# Altium PCB MB_v1.PcbDoc (part 4 of 10)
Units mm, origin at the board's own origin, x right, y up, seen from the top; angles counter-clockwise.
Board outline 203 x 72 mm, 6 copper layers (Top Layer, Layer 3, Layer 1, Layer 2, Layer 4, Bottom Layer), stack 1.52 mm thick; 655 components, 569 nets, 2943 pads, 1834 vias.
Unrouted connection lines stored in the file: 31.
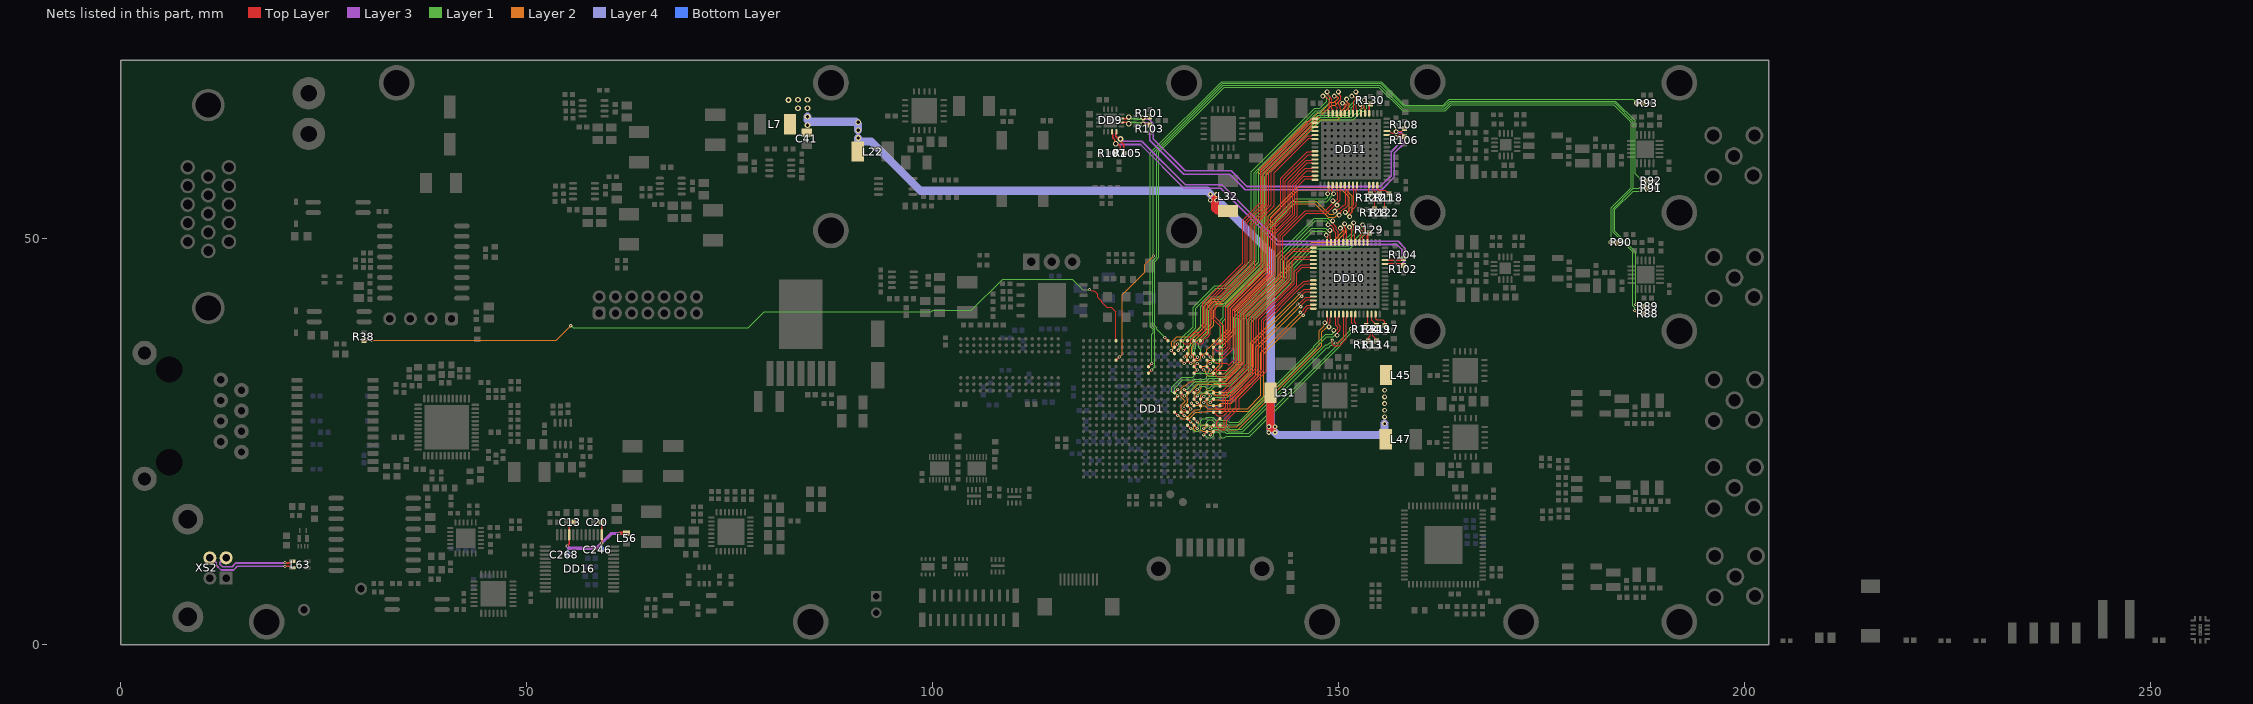
[diagram p7: the nets of this part, all layers, seen from the top]

## Part data (continued)
R80: library part "Чип резистор 0402 12.4 кОм, 1%", "ЧИП-резистор", Tolerance=±1%, PackageReference=0402, TKE="100 ppm/°С"
R82 R84 R85 R86: library part "Чип резистор 0402 75 Ом, 5%", "ЧИП-резистор", Tolerance=±5%, PackageReference=0402, TKE="100 ppm/°С"
R87 R178: library part "Чип резистор 0402 330 Ом, 5%", "ЧИП-резистор", Tolerance=±5%, PackageReference=0402, TKE="100 ppm/°С"
R89 R90 R92 R93 R99 R113 R115 R116 R117 R118 R128 R129 R130 R135 R136 R140 R141 R142 R143 R184 R185 R186 R187 R188: library part "Чип резистор 0402 100 Ом, 5%", "ЧИП-резистор", Tolerance=±5%, PackageReference=0402, TKE="100 ppm/°С"
R101 R103 R105 R107: library part "Чип резистор 0402 130 Ом, 5%", "ЧИП-резистор", Tolerance=±5%, PackageReference=0402, TKE="100 ppm/°С"
R102 R104 R106 R108: library part "Чип резистор 0402 82 Ом, 5%", "ЧИП-резистор", Tolerance=±5%, PackageReference=0402, TKE="100 ppm/°С"
R120 R126 R169: library part "Чип резистор 0402 200 Ом, 5%", "ЧИП-резистор", Tolerance=±5%, PackageReference=0402, TKE="100 ppm/°С"
R131 R132 R133 R134: library part "Чип резистор 0402 10 Ом, 5%", "ЧИП-резистор", Tolerance=±5%, PackageReference=0402, TKE="100 ppm/°С"
R137 R138: library part "Чип резистор 0402 47 Ом, 5%", "ЧИП-резистор", Tolerance=±5%, PackageReference=0402, TKE="100 ppm/°С"
R145: library part "Чип резистор 0402 2.7 кОм, 5%", "ЧИП-резистор", Tolerance=±5%, LatestRevisionDate=17-Jul-2002, LatestRevisionNote="Re-released for DXP Platform.", PackageReference=0402, Published=8-Jun-2000, Publisher="Altium Limited", TKE="100 ppm/°С"
R147 R148 R149 R150: library part "Чип резистор 0402 49,9 Ом, 1%", "ЧИП-резистор", Tolerance=±1%, PackageReference=0402, TKE="100 ppm/°С"
R152 R153 R154 R155 R157 R172 R173 R174: library part "Чип резистор 0402 0 Ом", "ЧИП-резистор", Tolerance=±5%, PackageReference=0402, TKE="100 ppm/°С"
R164: library part "Чип резистор 0402 12 кОм, 5%", "ЧИП-резистор", Tolerance=±5%, PackageReference=0402, TKE="100 ppm/°С"
R165 R166 R167 R168: library part "Чип резистор 0402 51 кОм, 5%", "ЧИП-резистор", Tolerance=±5%, PackageReference=0402, TKE="100 ppm/°С"
R171: library part "Чип резистор 0402 2,2 кОм, 5%", "ЧИП-резистор", Tolerance=±5%, PackageReference=0402, TKE="100 ppm/°С"
R175 R176 R177: library part "Чип резистор 0402 470 кОм, 5%", "ЧИП-резистор", Tolerance=±5%, PackageReference=0402, TKE="100 ppm/°С"
R? R?: library part "Чип резистор 0402 100 кОм, 5%", "ЧИП-резистор", Tolerance=±5%, PackageReference=0402, TKE="100 ppm/°С"
R?: library part "Чип резистор 0402 9,1 кОм, 5%", "ЧИП-резистор", Tolerance=±5%, PackageReference=0402, TKE="100 ppm/°С"
T1 T2 T3: library part "ЧИП трансформатор TC4-1T+", "RF Transformer 50Ω 0.5 to 300 MHz 1:4", Manufacturer=minicircuits, ManufacturerPartNumber=ADT2-1T+, ComponentLink1Description=datasheet, ComponentLink1URL=https://ww2.minicircuits.com/pdfs/ADT2-1T+.pdf
T4 T5: library part "ЧИП трансформатор MABA-011062", "1:2 Step up Flux Coupled Balun Transformer 1 – 300 MHz", Manufacturer=MACOM, ComponentLink1Description=datasheet, ComponentLink1URL=https://cdn.macom.com/datasheets/MABA-011062.pdf, ManufacturerPartNumber=MABA-011062
VD1 VD2: library part "ЧИП диод BAS16", "High-speed switching diodes", Manufacturer=Nexperia, Power/Voltage=100В, ComponentLink1Description=datasheet, ComponentLink1URL=https://assets.nexperia.com/documents/data-sheet/BAS16_SER.pdf, ManufacturerPartNumber=BAS16
VD3: library part "Диодная сборка RClamp1255P", "Low Capacitance RClamp Surge Protection for uUSB Interfaces", Manufacturer=SEMTECH, PackageReference=SLP1510N6
VU1 VU2 VU3: library part "Оптопара транзисторная PC3H7J00000F", "Mini-falt Package, General Purpose Half Pitch Photocouper", ComponentLink1Description="Manufacturer Link", ComponentLink1URL=http://www.vishay.com/optocouplers/list/product-83640/, ComponentLink2Description=Datasheet, ComponentLink2URL=http://www.vishay.com/docs/83640/83640.pdf, PackageReference=SOP-4
X1 X2 X3 X4: library part "Соединение под пайку", "Соединитель"
XP1: library part "Соединитель XT30UPB-M", "AMASS XT30UPB-M  5 mm"
XP2: library part "Соединитель IDC2-14MS", "JTAG Xilinx IDC2-14MS", Manufacturer=Molex
XP3: library part "Соединитель FH12-20S-0.5SVA", "FPC Connectors, Flex-to-Board, 20 Position, .5mm [.02in]"
XP4: library part "Соединитель FH12-10S-0.5SVA", "0.5mm  Pitch FPC/FFC Connector FH12 Series", Manufacturer=Hirose
XP6: library part "Соединитель WB-02 (MW-2M)", "Соединитель"
XP7: library part "Соединитель PLS-3 (DS1021-1x3)", "Вилка штыревая 2.54мм 1x3 прямая тип1"
XS1: library part "Соединитель KLS12-107L-2-8P8C-0", "Modular Jack RJ45", Manufacturer=KLS
XS2: library part "Соединитель USBB-1J", "Universal Serial Bus (USB) Shielded I/O Receptacle, Right Angle, Type B", Manufacturer=Connfly
XS3: library part "Соединитель DHR-15FB (DS1038-15F)", "Гнездо 15 pin высокой плотности на плату", Manufacturer=Connfly
XS4: library part "Соединитель KLS1-SATA001", "SATA Type A 7P Male Connector,SMD", Manufacturer=KLS
XW1 XW2 XW3 XW4 XW5: library part "Соединитель коаксиальный SMA-JR", "SMA-JR Разъем SMA гнездо на плату, прямой угол", ComponentLink1Description=datasheet, ComponentLink1URL=http://www.brownbear.ru/goods/2243.html
Z1 Z2 Z3: library part "Фильтр EMI EClamp2394P", "ESD/EMI Protection  for Color LCD Interfaces", Manufacturer=SEMTECH, PackageReference=SLP2116P8
Z4 Z5: library part "Фильтр EMI NUF4220MN", "ESD/EMI Protection  for Audio Interfaces", Manufacturer=onsemi, PackageReference=DFN8

## Free pads (board coordinates)
  round 4.4 hole 3.2: 1(18,2.8) 1(34,69.2) 1(85,2.8) 1(87.5,51) 1(87.5,69.2) 1(131,51) 1(131,69.2) 1(148,2.8) 1(161,38.6) 1(161,53.2) 1(161,69.3) 1(172.5,2.8) 1(192,2.8) 1(192,38.6) 1(192,53.2) 1(192,69.2)

## Via types
v1: diameter 0.4, hole 0.2, Top Layer to Bottom Layer, tented both sides, 654 vias
v2: diameter 0.8, hole 0.4, Top Layer to Bottom Layer, tented both sides, 489 vias
v3: diameter 0.6, hole 0.3, Top Layer to Bottom Layer, tented both sides, 354 vias
v4: diameter 0.7, hole 0.4, Top Layer to Bottom Layer, tented both sides, 144 vias
v5: diameter 0.8, hole 0.4, Top Layer to Bottom Layer, 87 vias
v6: diameter 0.9, hole 0.5, Top Layer to Bottom Layer, 45 vias
v7: diameter 0.66, hole 0.4, Top Layer to Bottom Layer, 25 vias
v8: diameter 0.7, hole 0.3, Top Layer to Bottom Layer, 13 vias
v9: diameter 0.5, hole 0.2, Top Layer to Bottom Layer, 12 vias
v10: diameter 0.5, hole 0.3, Top Layer to Bottom Layer, 5 vias
v11: diameter 1, hole 0.5, Top Layer to Bottom Layer, 2 vias
v12: diameter 0.4, hole 0.2, Top Layer to Bottom Layer, 2 vias
v13: diameter 0.9, hole 0.4, Top Layer to Bottom Layer, tented both sides, 2 vias

## Nets (pads, with @x,y where several pads share a name; then routed paths per layer and width w, separated by ;. In a path a pad name is that pad's centre, name@x,y a point inside that pad or via, vN(x,y) a via of type N, cw(c..) or ccw(c..) an arc to the next point about the centre after c; other vN are vias at no path point)
_USBD_N: L63.1 XS2.2 | length 10.6
  Top Layer w0.2: v1(20.25,10.1) 20.288,10.062 20.43,10.062 20.441,10.05 20.8,10.05 21,10.25 L63.1@21.175,10.25
  Layer 3 w0.2: XS2.2@12.997,10.683 12.787,10.683 12.197,10.093 12.197,9.927 12.541,9.583 13.735,9.583 14.202,10.05 20.059,10.05 20.07,10.062 20.212,10.062 v1(20.25,10.1)
_USBD_P: L63.4 XS2.3 | length 11.3
  Top Layer w0.2: v1(20.25,9.6) 20.288,9.638 20.43,9.638 20.441,9.65 20.8,9.65 21,9.45 L63.4@21.175,9.45
  Layer 3 w0.2: XS2.3@10.997,10.683 11.207,10.683 11.797,10.093 11.797,9.762 12.376,9.183 13.901,9.183 14.368,9.65 20.059,9.65 20.07,9.638 20.212,9.638 v1(20.25,9.6)
ADC0_D0_N: DD1.K20 DD10.21 | length 37.2
  Top Layer w0.125: v3(152.988,51.688) 153.066,51.609 153.066,51.327 153.286,51.106 153.286,50.491 153.004,50.209 153.004,49.963 153.092,49.875 DD10.21@153.092,49.548
  Top Layer w0.2: v1(133.411,29.824) DD1.K20@133.812,30.225
  Layer 1 w0.125: v1(133.411,29.824) 133.773,30.186 134.314,30.186 134.576,30.448 136.373,30.448 139.3,33.375 139.3,39.703 144.55,44.953 144.55,46.425 146.905,48.78 151.43,48.78 153.286,50.636 153.286,51.106 153.066,51.327 153.066,51.609 v3(152.988,51.688)
ADC0_D0_P: DD1.K19 DD10.22 | length 36.1
  Top Layer w0.125: v3(152.475,51.175) 152.553,51.097 152.836,51.097 152.961,50.972 152.961,50.625 152.679,50.343 152.679,49.963 152.592,49.875 DD10.22@152.592,49.548
  Top Layer w0.2: DD1.K19@133.012,30.225 133.051,30.225 133.375,30.549 v1(133.413,30.549)
  Layer 1 w0.125: v1(133.413,30.549) 133.851,30.986 134.364,30.986 134.576,30.773 136.239,30.773 138.975,33.51 138.975,39.837 144.225,45.087 144.225,46.56 146.77,49.105 151.295,49.105 152.961,50.771 152.961,50.972 152.836,51.097 152.553,51.097 v3(152.475,51.175)
ADC0_D1_N: DD1.K18 DD10.23 | length 36.6
  Top Layer w0.125: v3(151.888,51.938) 151.888,51.361 151.987,51.261 151.987,50.973 152.004,50.956 152.004,49.963 152.092,49.875 DD10.23@152.092,49.548
  Top Layer w0.2: DD1.K18@132.212,30.225 v1(132.613,30.626)
  Layer 1 w0.125: v1(132.613,30.626) 132.976,30.989 133.489,30.989 133.755,31.255 134.237,31.255 134.857,31.875 136.7,31.875 138.75,33.925 138.75,39.931 143.975,45.156 143.975,46.87 146.435,49.33 150.726,49.33 152.013,50.616 152.013,51.286 151.888,51.411 v3(151.888,51.938)
ADC0_D1_P: DD1.J18 DD10.24 | length 35.2
  Top Layer w0.125: v3(151.375,51.425) 151.375,51.414 151.662,51.126 151.662,50.838 151.679,50.822 151.679,49.963 151.592,49.875 DD10.24@151.592,49.548
  Top Layer w0.2: DD1.J18@132.212,31.025 132.219,31.025 132.606,31.412 v1(132.613,31.412)
  Layer 1 w0.125: v1(132.613,31.412) 132.99,31.789 133.564,31.789 133.773,31.58 134.102,31.58 134.722,32.2 136.565,32.2 138.425,34.06 138.425,40.065 143.65,45.29 143.65,47.005 146.3,49.655 150.592,49.655 151.687,50.751 151.687,51.151 151.414,51.425 v3(151.375,51.425)
ADC0_D2_N: DD1.M17 DD10.25 | length 37.5
  Top Layer w0.125: v3(150.763,51.813) 150.785,51.79 150.785,51.325 151.061,51.049 151.061,50.379 151.004,50.322 151.004,49.963 151.092,49.875 DD10.25@151.092,49.548
  Top Layer w0.2: v1(130.989,29.07) 130.989,29.059 131.412,28.636 DD1.M17@131.412,28.625
  Layer 2 w0.125: v1(130.989,29.07) 131.042,29.123 131.042,29.43 131.44,29.828 131.44,30.2 131.323,30.317 131.323,30.421 131.376,30.473 131.376,30.702 132.749,32.075 135.61,32.075 138.375,34.84 138.375,40.71 146.888,49.223 149.62,49.223 149.917,49.52 149.917,49.818 150.913,50.814 150.913,51.186 150.774,51.325 150.774,51.801 v3(150.763,51.813)
ADC0_D2_P: DD1.L17 DD10.26 | length 39.3
  Top Layer w0.125: v3(150.25,51.3) 150.351,51.3 150.736,50.915 150.736,50.513 150.679,50.456 150.679,49.963 150.592,49.875 DD10.26@150.592,49.548
  Top Layer w0.2: DD1.L17@131.412,29.425 v1(131.813,29.024)
  Layer 2 w0.125: v1(131.813,29.024) 131.498,28.708 130.839,28.708 130.627,28.92 130.627,29.474 131.115,29.962 131.115,30.066 131.042,30.139 130.985,30.139 130.648,30.476 130.648,31.577 130.935,31.864 131.164,31.864 131.7,32.4 135.475,32.4 138.05,34.975 138.05,40.844 146.754,49.548 149.485,49.548 149.592,49.655 149.592,49.952 150.588,50.948 150.588,51.052 150.339,51.3 v3(150.25,51.3)
ADC0_D3_N: DD1.K15 DD10.27 | length 38.5
  Top Layer w0.125: v3(149.288,52.188) 149.366,52.109 149.366,51.827 149.762,51.431 149.762,51.098 150.004,50.856 150.004,49.963 150.092,49.875 DD10.27@150.092,49.548
  Top Layer w0.2: DD1.K15@129.812,30.225 v1(130.213,30.626)
  Layer 1 w0.125: v1(130.213,30.626) 130.213,30.657 130.007,30.864 129.768,30.864 129.501,31.131 129.501,31.722 130.693,32.914 132.065,32.914 132.251,33.1 132.251,33.213 132.463,33.425 133.044,33.425 133.057,33.413 133.637,33.413 133.665,33.44 134.084,33.44 134.174,33.35 135.915,33.35 137.1,34.535 137.1,40.328 142.25,45.478 142.25,47.735 147.034,52.518 148.675,52.518 148.927,52.266 149.209,52.266 v3(149.288,52.188)
ADC0_D3_P: DD1.J15 DD10.28 | length 36.9
  Top Layer w0.125: v3(148.744,51.708) 148.823,51.629 149.105,51.629 149.437,51.296 149.437,50.963 149.679,50.722 149.679,49.963 149.592,49.875 DD10.28@149.592,49.548
  Top Layer w0.2: DD1.J15@129.812,31.025 v1(130.213,31.426)
  Layer 1 w0.125: v1(130.213,31.426) 130.213,31.396 130.007,31.189 129.903,31.189 129.826,31.266 129.826,31.587 130.828,32.589 132.261,32.589 132.333,32.661 133.561,32.661 133.773,32.873 133.773,33.042 133.846,33.115 133.95,33.115 134.04,33.025 136.05,33.025 137.425,34.4 137.425,40.193 142.575,45.343 142.575,47.6 147.168,52.193 148.54,52.193 148.665,52.068 148.665,51.787 v3(148.744,51.708)
ADC0_D4_N: DD1.J17 DD10.29 | length 32.9
  Top Layer w0.125: v3(148.95,51.013) 149.004,50.959 149.004,49.963 149.092,49.875 DD10.29@149.092,49.548
  Top Layer w0.2: v1(131.011,31.426) DD1.J17@131.412,31.025
  Layer 1 w0.125: v1(131.011,31.426) 131.417,31.426 132.09,32.1 132.426,32.436 133.752,32.436 134.116,32.8 136.143,32.8 137.725,34.382 137.725,40.175 142.92,45.37 142.92,47.43 146.741,51.25 148.433,51.25 148.591,51.093 148.87,51.093 v3(148.95,51.013)
ADC0_D4_P: DD1.J16 DD10.30 | length 32.4
  Top Layer w0.125: v3(148.504,50.441) 148.504,50.336 148.679,50.161 148.679,49.963 148.592,49.875 DD10.30@148.592,49.548
  Top Layer w0.2: DD1.J16@130.612,31.025 v1(131.013,30.624)
  Layer 1 w0.125: v1(131.013,30.624) 131.013,30.625 131.49,31.101 131.551,31.101 132.225,31.775 132.561,32.111 133.887,32.111 134.251,32.475 136.278,32.475 138.05,34.247 138.05,40.04 143.245,45.236 143.245,47.295 146.875,50.925 148.299,50.925 148.424,50.8 148.424,50.521 v3(148.504,50.441)
ADC0_D5_N: DD1.J22 DD10.33 | length 24.1
  Top Layer w0.125: DD1.J22@135.412,31.025 135.486,31.025 135.716,31.254 135.79,31.254 137.527,32.992 139,34.465 139,40.498 143.4,44.898 143.4,46.422 143.4,47.825 144.361,48.786 146.502,48.786 146.59,48.873 DD10.33@146.917,48.873
ADC0_D5_P: DD1.J21 DD10.34 | length 25.1
  Top Layer w0.125: DD1.J21@134.612,31.025 135,30.637 135.633,30.637 136.15,31.155 137.662,32.667 139.325,34.33 139.325,40.363 143.725,44.763 143.725,46.287 143.725,47.69 144.495,48.461 146.502,48.461 146.59,48.373 DD10.34@146.917,48.373
ADC0_D6_N: DD1.L22 DD10.35 | length 24.9
  Top Layer w0.125: DD1.L22@135.412,29.425 135.486,29.425 135.574,29.338 135.726,29.338 135.8,29.411 135.8,30.447 136.305,30.953 136.305,30.956 136.4,31.051 137.766,32.417 139.575,34.226 139.575,40.26 143.975,44.66 143.975,46.183 143.975,47.33 144.431,47.786 146.502,47.786 146.59,47.873 DD10.35@146.917,47.873
ADC0_D6_P: DD1.L21 DD10.36 | length 25.9
  Top Layer w0.125: DD1.L21@134.612,29.425 134.686,29.425 135.098,29.013 135.861,29.013 136.125,29.276 136.125,30.313 136.63,30.818 136.63,30.822 136.725,30.917 137.9,32.092 139.9,34.092 139.9,40.125 144.3,44.525 144.3,46.049 144.3,47.195 144.565,47.461 146.502,47.461 146.59,47.373 DD10.36@146.917,47.373
ADC0_D7_N: DD1.M22 DD10.37 | length 24.2
  Top Layer w0.125: DD1.M22@135.412,28.625 135.486,28.625 135.574,28.538 135.739,28.538 136.375,29.173 136.375,29.886 136.75,30.262 136.75,30.585 136.88,30.714 136.88,30.718 136.975,30.813 138.004,31.842 140.221,34.059 140.221,40.093 144.55,44.422 144.55,45.945 145.403,46.798 146.137,46.798 146.149,46.786 146.502,46.786 146.59,46.873 DD10.37@146.917,46.873
ADC0_D7_P: DD1.M21 DD10.38 | length 25.1
  Top Layer w0.125: DD1.M21@134.612,28.625 134.686,28.625 135.098,28.213 135.874,28.213 136.7,29.038 136.7,29.752 137.075,30.127 137.075,30.45 137.205,30.58 137.205,30.583 137.3,30.679 137.909,31.287 140.546,33.925 140.546,39.958 144.875,44.287 144.875,45.811 145.538,46.473 146.002,46.473 146.014,46.461 146.502,46.461 146.59,46.373 DD10.38@146.917,46.373
ADC0_D8_N: DD1.P22 DD10.41 | length 23.6
  Top Layer w0.125: DD1.P22@135.412,27.025 135.486,27.025 135.574,26.938 135.726,26.938 135.925,27.136 135.925,27.775 137.455,29.305 137.455,30.439 140.796,33.781 140.796,39.855 144.459,43.517 144.459,43.538 144.862,43.941 144.883,43.941 145.715,44.773 146.157,44.773 146.169,44.786 146.502,44.786 146.59,44.873 DD10.41@146.917,44.873
ADC0_D8_P: DD1.N22 DD10.42 | length 25.2
  Top Layer w0.125: DD1.N22@135.412,27.825 135.024,27.437 135.024,26.864 135.276,26.613 135.861,26.613 136.25,27.001 136.25,27.64 137.78,29.17 137.78,30.305 141.121,33.646 141.121,39.72 144.784,43.383 144.784,43.404 144.996,43.616 145.017,43.616 145.849,44.448 146.292,44.448 146.304,44.461 146.502,44.461 146.59,44.373 DD10.42@146.917,44.373
ADC0_D9_N: DD1.L19 DD10.43 | length 24.9
  Top Layer w0.125: v1(145.146,43.254) 145.199,43.306 145.323,43.306 145.802,43.786 146.502,43.786 146.59,43.873 DD10.43@146.917,43.873
  Top Layer w0.2: v1(132.611,29.826) DD1.L19@133.012,29.425
  Layer 2 w0.125: v1(132.611,29.826) 132.251,30.186 132.251,30.777 132.505,31.03 132.744,31.03 132.998,31.284 132.998,31.524 133.263,31.789 133.564,31.789 133.776,31.577 133.776,31.384 133.849,31.311 134.613,31.311 134.863,31.061 136.786,31.061 139.15,33.425 139.15,37.133 145.094,43.077 145.094,43.201 v1(145.146,43.254)
ADC0_D9_P: DD1.L18 DD10.44 | length 24.4
  Top Layer w0.125: v1(145.5,42.9) 145.553,42.953 145.553,43.076 145.937,43.461 146.502,43.461 146.59,43.373 DD10.44@146.917,43.373
  Top Layer w0.2: v1(131.898,29.739) DD1.L18@132.212,29.425
  Layer 2 w0.125: v1(131.898,29.739) 132.173,29.464 132.761,29.464 133.048,29.751 133.048,30.696 133.338,30.986 134.479,30.986 134.729,30.736 136.921,30.736 139.475,33.29 139.475,36.999 145.324,42.847 145.447,42.847 v1(145.5,42.9)
ADC0_D10_N: DD1.K21 DD10.45 | length 20.9
  Top Layer w0.125: v1(145.021,41.954) 145.074,42.006 145.198,42.006 145.977,42.786 146.502,42.786 146.59,42.873 DD10.45@146.917,42.873
  Top Layer w0.2: v1(134.211,29.824) DD1.K21@134.612,30.225
  Layer 2 w0.125: v1(134.211,29.824) 134.573,30.186 135.262,30.186 135.373,30.075 136.7,30.075 139.825,33.2 139.825,36.633 144.969,41.777 144.969,41.901 v1(145.021,41.954)
ADC0_D10_P: DD1.J20 DD10.46 | length 22.3
  Top Layer w0.125: v1(145.375,41.6) 145.428,41.653 145.428,41.776 146.112,42.461 146.502,42.461 146.59,42.373 DD10.46@146.917,42.373
  Top Layer w0.2: DD1.J20@133.812,31.025 v1(134.213,30.624)
  Layer 2 w0.125: v1(134.213,30.624) 133.848,30.258 133.848,29.673 134.06,29.461 135.161,29.461 135.373,29.673 135.373,29.677 135.446,29.75 136.835,29.75 140.15,33.065 140.15,36.499 145.199,41.547 145.322,41.547 v1(145.375,41.6)
ADC0_D11_N: DD1.M16 DD10.47 | length 25.8
  Top Layer w0.125: v1(145.321,40.929) 145.374,40.981 145.498,40.981 145.749,41.232 145.749,41.365 146.169,41.786 146.502,41.786 146.59,41.873 DD10.47@146.917,41.873
  Top Layer w0.2: DD1.M16@130.612,28.625 v1(131.013,28.224)
  Layer 2 w0.125: v1(131.013,28.224) 131.088,28.224 131.2,28.111 131.495,28.111 132.295,28.911 132.882,28.911 133.048,29.077 133.048,29.174 133.26,29.386 133.561,29.386 133.773,29.174 133.773,29.148 133.846,29.075 138.825,29.075 140.471,30.721 140.471,35.955 145.269,40.752 145.269,40.876 v1(145.321,40.929)
ADC0_D11_P: DD1.M15 DD10.48 | length 26.4
  Top Layer w0.125: v1(145.675,40.575) 145.728,40.628 145.728,40.751 146.074,41.097 146.074,41.23 146.304,41.461 146.502,41.461 146.59,41.373 DD10.48@146.917,41.373
  Top Layer w0.2: DD1.M15@129.812,28.625 v1(130.213,28.224)
  Layer 2 w0.125: v1(130.213,28.224) 130.262,28.224 130.7,27.786 131.63,27.786 132.43,28.586 133.016,28.586 133.115,28.685 133.237,28.685 133.26,28.661 133.684,28.661 133.773,28.75 138.959,28.75 140.796,30.587 140.796,35.82 145.499,40.522 145.622,40.522 v1(145.675,40.575)
ADC0_D12_N: DD1.N18 DD10.51 | length 24.3
  Top Layer w0.125: v3(148.337,39.641) 148.435,39.641 148.679,39.885 148.679,40.284 148.592,40.371 DD10.51@148.592,40.698
  Top Layer w0.2: DD1.N18@132.212,27.825 v1(132.613,27.424)
  Layer 2 w0.125: v1(132.613,27.424) 133.099,26.938 133.212,26.938 133.26,26.986 134.041,26.986 134.052,26.975 134.406,26.975 134.573,26.807 137.473,26.807 147.618,36.953 147.618,38.639 148.259,39.28 148.259,39.563 v3(148.337,39.641)
ADC0_D12_P: DD1.N17 DD10.52 | length 26.5
  Top Layer w0.125: v3(148.847,39.125) 148.867,39.145 148.867,39.613 149.004,39.75 149.004,40.284 149.092,40.371 DD10.52@149.092,40.698
  Top Layer w0.2: DD1.N17@131.412,27.825 v1(131.813,27.424)
  Layer 2 w0.125: v1(131.813,27.424) 132.176,27.061 132.176,26.548 132.463,26.261 132.764,26.261 132.876,26.373 133.148,26.373 133.272,26.25 134.361,26.25 134.593,26.482 137.607,26.482 147.943,36.818 147.943,38.505 148.486,39.047 148.769,39.047 v3(148.847,39.125)
ADC0_D13_N: DD1.P18 DD10.53 | length 26
  Top Layer w0.125: v3(149.435,38.701) 149.518,38.784 149.791,38.784 149.922,38.915 149.922,39.079 149.679,39.323 149.679,40.284 149.592,40.371 DD10.53@149.592,40.698
  Top Layer w0.2: DD1.P18@132.212,27.025 v1(132.613,26.624)
  Layer 1 w0.125: v1(132.613,26.624) 132.613,26.698 132.723,26.807 132.723,27.02 133.051,27.348 133.051,27.577 133.275,27.801 133.593,27.801 133.817,28.025 134.55,28.025 134.925,27.65 136.262,27.65 136.537,27.375 137.725,27.375 146.949,36.599 146.949,36.758 148.44,38.249 149.256,38.249 149.352,38.344 149.352,38.618 v3(149.435,38.701)
ADC0_D13_P: DD1.P17 DD10.54 | length 27.5
  Top Layer w0.125: v3(149.839,38.099) 149.922,38.182 149.922,38.455 150.247,38.78 150.247,39.214 150.004,39.457 150.004,40.284 150.092,40.371 DD10.54@150.092,40.698
  Top Layer w0.2: DD1.P17@131.412,27.025 v1(131.813,26.624)
  Layer 1 w0.125: v1(131.813,26.624) 131.862,26.624 132.225,26.261 132.764,26.261 133.048,26.545 133.048,26.886 133.226,27.064 133.564,27.064 133.799,27.299 133.799,27.464 134.034,27.7 134.416,27.7 134.79,27.325 136.128,27.325 136.403,27.05 137.86,27.05 147.274,36.465 147.274,36.623 148.575,37.924 149.39,37.924 149.483,38.016 149.756,38.016 v3(149.839,38.099)
ADC0_D14_N: DD1.P21 DD10.55 | length 25.1
  Top Layer w0.125: v1(149.6,37.15) 149.602,37.152 150.05,37.152 150.679,37.781 150.679,40.284 150.592,40.371 DD10.55@150.592,40.698
  Top Layer w0.2: v1(134.211,26.612) 134.211,26.618 134.612,27.019 DD1.P21@134.612,27.025
  Layer 1 w0.125: v1(134.211,26.612) 134.248,26.65 134.546,26.65 134.641,26.745 135.93,26.745 136.45,26.225 138.21,26.225 148.568,36.583 148.809,36.583 149.069,36.843 149.169,36.843 149.424,37.097 149.547,37.097 v1(149.6,37.15)
ADC0_D14_P: DD1.P20 DD10.56 | length 27.2
  Top Layer w0.125: v1(149.246,37.504) 149.237,37.495 149.237,37 149.45,36.787 150.145,36.787 151.004,37.646 151.004,40.284 151.092,40.371 DD10.56@151.092,40.698
  Top Layer w0.2: v1(133.411,26.624) DD1.P20@133.812,27.025
  Layer 1 w0.125: v1(133.411,26.624) 133.463,26.676 133.762,26.676 134.06,26.975 134.412,26.975 134.507,27.07 136.065,27.07 136.585,26.55 138.075,26.55 148.433,36.908 148.675,36.908 148.934,37.168 149.034,37.168 149.194,37.327 149.194,37.451 v1(149.246,37.504)
ADC0_D15_N: DD1.R21 DD10.57 | length 26.1
  Top Layer w0.125: v1(151.491,38.9) 151.544,38.953 151.672,38.953 151.814,39.095 151.814,39.459 151.679,39.594 151.679,40.284 151.592,40.371 DD10.57@151.592,40.698
  Top Layer w0.2: v1(134.211,25.824) DD1.R21@134.612,26.225
  Layer 1 w0.125: v1(134.211,25.824) 134.211,25.898 134.326,26.013 134.326,26.111 134.729,26.514 135.298,26.514 135.626,26.186 135.99,26.186 136.176,26 138.963,26 149.963,37 149.963,37.243 151.438,38.719 151.438,38.847 v1(151.491,38.9)
ADC0_D15_P: DD1.R20 DD10.58 | length 28
  Top Layer w0.125: v1(151.854,38.546) 151.906,38.599 151.906,38.727 152.139,38.96 152.139,39.594 152.004,39.729 152.004,40.284 152.092,40.371 DD10.58@152.092,40.698
  Top Layer w0.2: v1(133.411,25.824) DD1.R20@133.812,26.225
  Layer 1 w0.125: v1(133.411,25.824) 133.462,25.824 133.825,25.461 134.361,25.461 134.651,25.751 134.651,25.977 134.863,26.189 135.164,26.189 135.451,25.902 135.451,25.673 135.663,25.461 135.964,25.461 136.178,25.675 139.097,25.675 150.288,36.865 150.288,37.109 151.673,38.494 151.801,38.494 v1(151.854,38.546)
ADC1_D0_N: DD1.C19 DD11.21 | length 45.7
  Top Layer w0.125: v3(153.185,67.061) 153.204,67.041 153.204,65.979 153.292,65.891 DD11.21@153.292,65.564
  Top Layer w0.2: DD1.C19@133.012,35.825 v1(133.413,35.424)
  Layer 1 w0.125: v1(133.413,35.424) 133.074,35.763 133.074,36.299 132.788,36.586 132.788,37.1 134.05,38.362 134.05,41.125 134.85,41.925 135.8,41.925 140.925,47.05 140.925,57.607 147.942,64.624 151.811,64.624 152.87,65.683 153.099,65.683 153.503,66.087 153.503,66.459 153.263,66.7 153.263,66.982 v3(153.185,67.061)
ADC1_D0_P: DD1.D18 DD11.22 | length 44.9
  Top Layer w0.125: v3(152.692,66.528) 152.692,66.405 152.879,66.217 152.879,65.979 152.792,65.891 DD11.22@152.792,65.564
  Top Layer w0.2: DD1.D18@132.212,35.025 132.242,35.025 132.613,35.396 v1(132.644,35.396)
  Layer 1 w0.125: v1(132.644,35.396) 132.293,35.747 132.293,36.335 132.35,36.392 132.35,36.473 132.463,36.586 132.463,37.234 133.725,38.496 133.725,41.26 134.715,42.25 135.665,42.25 140.6,47.185 140.6,57.742 147.807,64.949 151.677,64.949 152.735,66.008 152.964,66.008 153.178,66.221 153.178,66.325 153.053,66.45 152.77,66.45 v3(152.692,66.528)
ADC1_D1_N: DD1.C18 DD11.23 | length 47.7
  Top Layer w0.125: v3(152.169,68.077) 152.247,67.998 152.247,67.716 152.467,67.495 152.467,67.049 152.204,66.786 152.204,65.979 152.292,65.891 DD11.23@152.292,65.564
  Top Layer w0.2: v1(131.811,35.424) DD1.C18@132.212,35.825
  Layer 1 w0.125: v1(131.811,35.424) 131.811,35.457 132.068,35.714 132.068,36.428 132.125,36.485 132.125,37.725 133.35,38.95 133.35,41.55 134.325,42.525 135.622,42.525 140.225,47.128 140.225,57.925 147.474,65.174 151.339,65.174 151.617,65.452 151.617,66.107 152.467,66.958 152.467,67.495 152.247,67.716 152.247,67.998 v3(152.169,68.077)
ADC1_D1_P: DD1.C17 DD11.24 | length 47.4
  Top Layer w0.125: v3(151.656,67.564) 151.734,67.486 152.017,67.486 152.142,67.361 152.142,67.184 151.879,66.921 151.879,65.979 151.792,65.891 DD11.24@151.792,65.564
  Top Layer w0.2: v1(131.011,35.424) DD1.C17@131.412,35.825
  Layer 1 w0.125: v1(131.011,35.424) 131.522,35.935 131.522,36.572 131.8,36.85 131.8,37.86 133.025,39.085 133.025,41.685 134.19,42.85 135.488,42.85 139.9,47.262 139.9,58.06 147.339,65.499 151.204,65.499 151.292,65.587 151.292,66.242 152.142,67.092 152.142,67.361 152.017,67.486 151.734,67.486 v3(151.656,67.564)
ADC1_D2_N: DD1.D17 DD11.25 | length 45.1
  Top Layer w0.125: v3(151.026,67.188) 151.094,67.119 151.094,66.7 151.204,66.59 151.204,65.979 151.292,65.891 DD11.25@151.292,65.564
  Top Layer w0.2: DD1.D17@131.412,35.025 v1(131.813,34.624)
  Layer 2 w0.125: v1(131.813,34.624) 131.813,34.657 132.173,35.017 132.173,35.574 131.962,35.785 131.962,36.662 134.65,39.35 134.65,41.204 135.158,41.712 136.255,41.712 141.1,46.558 141.1,57.917 147.807,64.624 149.946,64.624 150.624,65.302 150.624,65.512 151.324,66.212 151.324,66.606 151.104,66.827 151.104,67.109 v3(151.026,67.188)
ADC1_D2_P: DD1.D16 DD11.26 | length 44.5
  Top Layer w0.125: v3(150.513,66.675) 150.642,66.675 150.788,66.529 150.806,66.529 150.879,66.455 150.879,65.979 150.792,65.891 DD11.26@150.792,65.564
  Top Layer w0.2: DD1.D16@130.612,35.025 v1(131.013,34.624)
  Layer 2 w0.125: v1(131.013,34.624) 131.373,34.983 131.373,35.499 131.637,35.763 131.637,36.797 134.325,39.485 134.325,41.339 135.024,42.038 136.12,42.038 140.775,46.692 140.775,58.051 147.673,64.949 149.811,64.949 150.299,65.437 150.299,65.647 150.999,66.347 150.999,66.472 150.874,66.597 150.591,66.597 v3(150.513,66.675)
ADC1_D3_N: DD1.B15 DD11.27 | length 46.2
  Top Layer w0.125: v3(150.01,68.077) 150.088,67.998 150.088,67.716 150.308,67.495 150.308,67.16 150.025,66.877 150.025,66.473 150.204,66.294 150.204,65.979 150.292,65.891 DD11.27@150.292,65.564
  Top Layer w0.2: DD1.B15@129.812,36.625 v1(130.213,37.026)
  Layer 2 w0.125: v1(130.213,37.026) v1(130.213,37.026) 129.979,36.793 129.875,36.793 129.802,36.866 129.802,37.163 130.2,37.561 131.861,37.561 133.83,39.53 133.83,41.57 134.522,42.263 135.813,42.263 140.525,46.975 140.525,58.475 146.2,64.15 146.555,64.15 147.579,65.174 147.899,65.174 149.174,66.449 149.633,66.449 150.307,67.123 150.307,67.496 150.088,67.716 150.088,67.998 v3(150.01,68.077)
ADC1_D3_P: DD1.C15 DD11.28 | length 45.9
  Top Layer w0.125: v3(149.497,67.564) 149.575,67.486 149.858,67.486 149.983,67.361 149.983,67.294 149.7,67.012 149.7,66.338 149.879,66.16 149.879,65.979 149.792,65.891 DD11.28@149.792,65.564
  Top Layer w0.2: v1(129.411,36.226) DD1.C15@129.812,35.825
  Layer 2 w0.125: v1(129.411,36.226) 129.412,36.226 129.645,36.46 129.645,36.563 129.477,36.732 129.477,37.298 130.065,37.886 131.726,37.886 133.505,39.664 133.505,41.705 134.387,42.588 135.678,42.588 140.2,47.11 140.2,58.61 146.065,64.475 146.421,64.475 147.445,65.499 147.764,65.499 149.039,66.774 149.498,66.774 149.982,67.258 149.982,67.362 149.871,67.473 149.588,67.473 v3(149.497,67.564)
ADC1_D4_N: DD1.B17 DD11.29 | length 44.1
  Top Layer w0.125: v3(148.613,68.077) 148.691,67.998 148.691,67.716 149.009,67.397 149.009,67.362 149.204,67.167 149.204,65.979 149.292,65.891 DD11.29@149.292,65.564
  Top Layer w0.2: v1(130.912,36.225) 130.962,36.225 131.362,36.625 DD1.B17@131.412,36.625
  Layer 1 w0.125: v1(130.912,36.225) 130.912,36.28 130.756,36.436 130.756,36.597 130.933,36.774 130.933,37.523 132.433,39.023 132.433,41.411 134.895,43.873 136.192,43.873 139.611,47.292 139.611,58.089 147.246,65.724 147.859,65.724 148.911,66.777 148.911,67.495 148.691,67.716 148.691,67.998 v3(148.613,68.077)
ADC1_D4_P: DD1.B16 DD11.30 | length 43.4
  Top Layer w0.125: v3(148.1,67.564) 148.178,67.486 148.461,67.486 148.684,67.262 148.684,67.227 148.879,67.033 148.879,65.979 148.792,65.891 DD11.30@148.792,65.564
  Top Layer w0.2: v1(130.275,36.25) 130.275,36.269 130.612,36.606 DD1.B16@130.612,36.625
  Layer 1 w0.125: v1(130.275,36.25) 130.275,36.305 130.431,36.461 130.431,36.731 130.608,36.908 130.608,37.658 132.108,39.158 132.108,41.545 134.76,44.198 136.057,44.198 139.286,47.426 139.286,58.224 147.112,66.049 147.724,66.049 148.586,66.911 148.586,67.361 148.461,67.486 148.178,67.486 v3(148.1,67.564)
ADC1_D5_N: DD1.A17 DD11.33 | length 34.5
  Top Layer w0.125: DD1.A17@131.412,37.425 131.465,37.478 131.465,37.685 132.243,38.464 132.889,38.464 133.275,38.85 133.275,42.092 138.225,47.042 138.225,52.255 140.425,54.455 140.425,58.525 146.489,64.589 146.624,64.589 146.797,64.762 DD11.33@147.124,64.762
ADC1_D5_P: DD1.A16 DD11.34 | length 35.5
  Top Layer w0.125: DD1.A16@130.612,37.425 131,37.037 131.573,37.037 131.8,37.264 131.8,37.561 132.378,38.139 133.023,38.139 133.6,38.715 133.6,41.957 138.55,46.907 138.55,52.121 140.75,54.321 140.75,58.39 146.624,64.264 147.122,64.264 DD11.34@147.124,64.262
ADC1_D6_N: DD1.A19 DD11.35 | length 32.7
  Top Layer w0.125: DD1.A19@133.012,37.425 133.012,37.499 133.099,37.587 133.099,37.72 133.522,38.143 133.707,38.143 133.9,38.336 133.9,41.903 138.8,46.803 138.8,48.327 138.8,52.017 141.1,54.317 141.1,58.386 146.388,63.675 146.71,63.675 146.797,63.762 DD11.35@147.124,63.762
ADC1_D6_P: DD1.A18 DD11.36 | length 33.7
  Top Layer w0.125: DD1.A18@132.212,37.425 132.286,37.425 132.673,37.037 133.173,37.037 133.424,37.289 133.424,37.586 133.657,37.818 133.842,37.818 134.225,38.201 134.225,41.769 139.125,46.669 139.125,48.192 139.125,51.883 141.425,54.183 141.425,58.252 146.523,63.349 146.71,63.349 146.797,63.262 DD11.36@147.124,63.262
ADC1_D7_N: DD1.A22 DD11.37 | length 31.6
  Top Layer w0.125: DD1.A22@135.412,37.425 135.412,37.499 135.55,37.637 135.55,38.258 135.537,38.27 135.537,39.138 134.487,40.188 134.487,41.678 139.375,46.565 139.375,48.089 139.375,51.779 141.758,54.162 141.758,58.231 146.201,62.674 146.71,62.674 146.797,62.762 DD11.37@147.124,62.762
ADC1_D7_P: DD1.A21 DD11.38 | length 32.6
  Top Layer w0.125: DD1.A21@134.612,37.425 134.686,37.425 134.686,37.395 135.043,37.037 135.573,37.037 135.875,37.34 135.875,38.392 135.862,38.405 135.862,39.272 134.812,40.322 134.812,41.543 139.7,46.431 139.7,47.954 139.7,51.644 142.083,54.027 142.083,58.096 146.336,62.349 146.71,62.349 146.797,62.262 DD11.38@147.124,62.262
ADC1_D8_N: DD1.B22 DD11.41 | length 29.9
  Top Layer w0.125: DD1.B22@135.412,36.625 135.486,36.625 135.574,36.538 135.832,36.538 136.125,36.831 136.125,38.496 136.112,38.508 136.112,41.676 140.525,46.089 140.525,47.612 140.525,51.303 142.908,53.685 142.908,57.442 146.14,60.675 146.71,60.675 146.797,60.762 DD11.41@147.124,60.762
ADC1_D8_P: DD1.B21 DD11.42 | length 30.8
  Top Layer w0.125: DD1.B21@134.612,36.625 135.024,36.213 135.966,36.213 136.45,36.696 136.45,38.631 136.437,38.643 136.437,41.542 140.85,45.954 140.85,47.478 140.85,51.168 143.233,53.551 143.233,57.308 146.275,60.35 146.71,60.35 146.797,60.262 DD11.42@147.124,60.262
ADC1_D9_N: DD1.C22 DD11.43 | length 29.9
  Top Layer w0.125: DD1.C22@135.412,35.825 135.412,35.794 135.619,35.588 135.723,35.588 136.7,36.565 136.7,38.734 136.687,38.747 136.687,41.438 141.1,45.851 141.1,47.374 141.1,51.065 143.483,53.447 143.483,57.092 146.065,59.675 146.71,59.675 146.797,59.762 DD11.43@147.124,59.762
ADC1_D9_P: DD1.D22 DD11.44 | length 29.9
  Top Layer w0.125: DD1.D22@135.412,35.025 135.412,35.056 135.619,35.262 135.857,35.262 137.025,36.43 137.025,38.869 137.012,38.881 137.012,41.304 141.425,45.716 141.425,47.24 141.425,50.93 143.808,53.312 143.808,56.958 146.199,59.35 146.71,59.35 146.797,59.262 DD11.44@147.124,59.262
ADC1_D10_N: DD1.D21 DD11.45 | length 31.5
  Top Layer w0.125: DD1.D21@134.612,35.025 135,34.637 135.653,34.637 135.678,34.663 136.256,34.663 136.451,34.468 136.555,34.468 137.275,35.188 137.275,38.972 137.262,38.985 137.262,41.2 141.675,45.613 141.675,47.136 141.675,50.826 144.058,53.209 144.058,56.78 145.952,58.675 146.71,58.675 146.797,58.762 DD11.45@147.124,58.762
ADC1_D10_P: DD1.E21 DD11.46 | length 31.6
  Top Layer w0.125: DD1.E21@134.612,34.225 135.024,33.813 135.665,33.813 135.69,33.787 136.256,33.787 136.611,34.143 136.689,34.143 137.6,35.054 137.6,39.107 137.587,39.119 137.587,41.065 142,45.478 142,47.001 142,50.692 144.383,53.074 144.383,56.646 146.086,58.349 146.71,58.349 146.797,58.262 DD11.46@147.124,58.262
ADC1_D11_N: DD1.F22 DD11.47 | length 30.6
  Top Layer w0.125: DD1.F22@135.412,33.425 135.486,33.425 135.574,33.338 136.238,33.338 137.85,34.95 137.85,39.21 137.837,39.223 137.837,40.962 142.25,45.374 142.25,46.898 142.25,50.588 144.633,52.971 144.633,56.542 145.765,57.674 146.71,57.674 146.797,57.762 DD11.47@147.124,57.762
ADC1_D11_P: DD1.F21 DD11.48 | length 31.5
  Top Layer w0.125: DD1.F21@134.612,33.425 134.686,33.425 135.098,33.013 136.372,33.013 138.175,34.815 138.175,39.345 138.162,39.358 138.162,40.827 142.575,45.24 142.575,46.763 142.575,50.454 144.958,52.836 144.958,56.408 145.899,57.349 146.71,57.349 146.797,57.262 DD11.48@147.124,57.262
ADC1_D12_N: DD1.C20 DD11.51 | length 31.2
  Top Layer w0.125: v3(148.686,55.525) 148.686,55.636 148.887,55.836 148.887,56.173 148.799,56.26 DD11.51@148.799,56.587
  Top Layer w0.2: DD1.C20@133.812,35.825 v1(134.213,35.424)
  Layer 1 w0.125: v1(134.213,35.424) 134.213,35.393 134.42,35.186 134.659,35.186 134.784,35.061 135.164,35.061 135.45,35.347 135.45,39.971 135.813,40.333 135.813,41.597 141.328,47.113 141.328,51.553 144.675,54.9 148.461,54.9 148.672,55.111 148.672,55.511 v3(148.686,55.525)
ADC1_D12_P: DD1.D20 DD11.52 | length 31.9
  Top Layer w0.125: DD11.52@149.299,56.587 149.299,56.26 149.212,56.173 149.212,55.836 149.411,55.636 v3(149.411,55.525)
  Top Layer w0.2: DD1.D20@133.812,35.025 v1(134.213,34.624)
  Layer 1 w0.125: v1(134.213,34.624) 134.213,34.654 134.42,34.861 134.524,34.861 134.649,34.736 135.298,34.736 135.775,35.213 135.775,39.836 136.138,40.199 136.138,41.463 141.653,46.978 141.653,51.419 144.81,54.575 148.596,54.575 148.997,54.976 148.997,55.111 v3(149.411,55.525)
ADC1_D13_N: DD1.G22 DD11.53 | length 32.4
  Top Layer w0.125: DD1.G22@135.412,32.625 135.65,32.387 136.11,32.387 137.382,33.66 138.425,34.703 138.425,39.449 138.412,39.461 138.412,40.724 142.825,45.136 142.825,46.66 142.825,50.35 145.934,53.459 148.416,53.459 148.961,54.003 149.247,54.289 149.247,54.572 v3(149.325,54.65) 149.403,54.728 149.686,54.728 149.899,54.941 149.899,55.727 149.887,55.739 149.887,56.173 149.799,56.26 DD11.53@149.799,56.587
ADC1_D13_P: DD1.H22 DD11.54 | length 32.9
  Top Layer w0.125: DD1.H22@135.412,31.825 135.649,32.062 136.244,32.062 137.517,33.335 138.75,34.568 138.75,39.583 138.737,39.596 138.737,40.589 143.15,45.002 143.15,46.525 143.15,50.215 146.068,53.134 148.551,53.134 149.286,53.869 149.477,54.059 149.759,54.059 v3(149.838,54.137) 149.916,54.216 149.916,54.498 150.224,54.807 150.224,55.862 150.212,55.874 150.212,56.173 150.299,56.26 DD11.54@150.299,56.587
ADC1_D14_N: DD1.E20 DD11.55 | length 37
  Top Layer w0.125: v3(149.575,53.4) 149.704,53.4 149.96,53.657 150.158,53.657 150.538,54.038 150.67,54.038 150.887,54.254 150.887,56.173 150.799,56.26 DD11.55@150.799,56.587
  Top Layer w0.2: DD1.E20@133.812,34.225 v1(134.213,33.824)
  Layer 2 w0.125: v1(134.213,33.824) 134.183,33.824 133.976,33.617 133.976,33.513 134.053,33.436 134.374,33.436 135.387,34.449 135.387,36.972 136.987,38.572 136.987,41.137 141.9,46.05 141.9,52.185 144.336,54.62 147.255,54.62 148.9,52.975 149.414,52.975 149.487,53.048 149.487,53.312 v3(149.575,53.4)
ADC1_D14_P: DD1.E19 DD11.56 | length 38.1
  Top Layer w0.125: v3(150.094,52.894) 150.094,52.997 150.387,53.29 150.387,53.427 150.673,53.713 150.805,53.713 151.212,54.119 151.212,56.173 151.299,56.26 DD11.56@151.299,56.587
  Top Layer w0.2: DD1.E19@133.012,34.225 v1(133.413,33.824)
  Layer 2 w0.125: v1(133.413,33.824) 133.444,33.824 133.651,33.617 133.651,33.378 133.918,33.111 134.509,33.111 135.712,34.315 135.712,36.837 137.312,38.437 137.312,41.003 142.225,45.915 142.225,52.05 144.47,54.295 147.12,54.295 148.765,52.65 149.549,52.65 149.714,52.816 150.016,52.816 v3(150.094,52.894)
ADC1_D15_N: DD1.E18 DD11.57 | length 41.3
  Top Layer w0.125: v3(150.875,53.225) 150.953,53.303 151.236,53.303 151.361,53.428 151.361,53.677 151.887,54.202 151.887,56.173 151.799,56.26 DD11.57@151.799,56.587
  Top Layer w0.2: DD1.E18@132.212,34.225 v1(132.613,34.626)
  Layer 2 w0.125: v1(132.613,34.626) 132.979,34.261 133.564,34.261 133.828,34.525 133.828,34.75 134.089,35.012 134.314,35.012 134.576,35.273 134.576,36.374 134.527,36.423 134.527,36.527 136.762,38.762 136.762,41.442 141.675,46.355 141.675,52.65 145.05,56.025 150.45,56.025 151.361,55.114 151.361,53.428 151.236,53.303 150.953,53.303 v3(150.875,53.225)
ADC1_D15_P: DD1.F18 DD11.58 | length 43
  Top Layer w0.125: v3(151.388,52.712) 151.466,52.791 151.466,53.073 151.686,53.294 151.686,53.542 152.212,54.068 152.212,56.173 152.299,56.26 DD11.58@152.299,56.587
  Top Layer w0.2: DD1.F18@132.212,33.425 v1(132.613,33.826)
  Layer 2 w0.125: v1(132.613,33.826) 132.251,34.189 132.251,34.777 132.506,35.031 132.791,35.031 133.042,35.282 133.042,35.565 133.289,35.812 133.572,35.812 133.818,36.058 133.818,36.34 134.063,36.586 134.127,36.586 136.437,38.897 136.437,41.577 141.35,46.49 141.35,52.785 144.915,56.35 150.585,56.35 151.686,55.248 151.686,53.294 151.466,53.073 151.466,52.791 v3(151.388,52.712)
ADC_CLK0_N: DD9.11 DD10.13 R104.1 R107.2 | length 48.7
  Top Layer w0.2: DD9.11@122.146,63.158 122.146,62.919 122.196,62.869 122.196,62.444 122.479,62.161 122.479,61.784 122.67,61.593 122.971,61.593 123.15,61.414 123.15,61.248 123.044,61.143 123.044,60.946 R107.2@122.592,60.494 ; DD10.13@155.767,47.373 156.073,47.373 156.123,47.323 156.784,47.323 156.795,47.335 156.937,47.335 v1(156.975,47.373) 157.013,47.335 157.155,47.335 157.173,47.317 157.689,47.317 157.728,47.356 157.806,47.356 R104.1@158.006,47.556
  Layer 3 w0.2: v4(122.575,61.689) 122.67,61.593 125.632,61.593 131,56.225 135.5,56.225 142.45,49.275 157.2,49.275 157.85,48.625 157.85,47.478 157.728,47.356 156.992,47.356 v1(156.975,47.373)
ADC_CLK0_P: DD9.12 DD10.12 R102.1 R105.2 | length 49.3
  Top Layer w0.2: DD9.12@122.646,63.158 122.646,62.919 122.596,62.869 122.596,62.609 122.838,62.368 123.062,62.368 123.254,62.176 123.254,61.876 123.55,61.58 123.55,61.083 123.444,60.977 123.444,60.647 R105.2@123.597,60.494 ; DD10.12@155.767,46.873 156.073,46.873 156.123,46.923 156.784,46.923 156.795,46.911 156.937,46.911 v1(156.975,46.873) 157.013,46.911 157.155,46.911 157.16,46.917 157.689,46.917 157.728,46.878 157.806,46.878 R102.1@158.006,46.678
  Layer 3 w0.2: v4(123.158,62.272) 123.246,62.272 123.525,61.993 125.798,61.993 131.166,56.625 135.666,56.625 142.616,49.675 157.366,49.675 158.25,48.791 158.25,47.312 157.811,46.873 v1(156.975,46.873)
ADC_CLK1_N: DD9.14 DD11.13 R103.2 R108.1 | length 49.5
  Top Layer w0.125: DD11.13@155.974,63.262 156.301,63.262 156.506,63.057 156.554,63.057 156.628,62.984 156.806,62.984 157.006,63.184 v3(157.117,63.184) 157.151,63.218 157.822,63.218 157.896,63.291 157.896,63.321 R108.1@158.133,63.558
  Top Layer w0.2: DD9.14@123.296,64.308 123.535,64.308 123.585,64.358 123.946,64.358 124.159,64.145 v4(124.174,64.145) ; v4(125.952,64.082) 126.672,64.082 R103.2@126.762,63.992
  Layer 3 w0.2: v4(125.952,64.082) 126.087,64.082 126.3,64.294 126.552,64.294 126.78,64.067 126.78,62.129 130.959,57.95 136.625,57.95 138.55,56.025 155.341,56.025 156.9,57.584 156.9,60.545 158.184,61.829 158.184,62.67 157.833,63.021 157.388,63.021 157.225,63.184 v3(157.117,63.184)
  Layer 1 w0.2: v4(124.174,64.145) 124.309,64.145 124.522,64.358 125.066,64.358 125.129,64.294 125.604,64.294 125.817,64.082 v4(125.952,64.082)
ADC_CLK1_P: DD9.15 DD11.12 R101.2 R106.1 | length 48.3
  Top Layer w0.125: DD11.12@155.974,62.762 156.004,62.732 156.42,62.732 156.493,62.659 156.806,62.659 157.006,62.459 v3(157.117,62.459) 157.174,62.459 157.608,62.893 157.822,62.893 157.896,62.82 157.896,62.79 R106.1@158.133,62.553
  Top Layer w0.2: DD9.15@123.296,64.808 123.535,64.808 123.585,64.758 123.946,64.758 124.159,64.971 v4(124.174,64.971) ; v4(125.952,64.907) 126.672,64.907 R101.2@126.762,64.997
  Layer 3 w0.2: v4(125.952,64.907) 126.087,64.907 126.3,64.694 126.718,64.694 127.18,64.232 127.18,62.295 131.125,58.35 136.791,58.35 138.716,56.425 155.175,56.425 156.5,57.75 156.5,60.711 157.784,61.995 157.784,62.504 157.667,62.622 157.388,62.622 157.225,62.459 v3(157.117,62.459)
  Layer 1 w0.2: v4(124.174,64.971) 124.309,64.971 124.522,64.758 125.231,64.758 125.295,64.694 125.604,64.694 125.817,64.907 v4(125.952,64.907)
ADC_DITH0: DD10.20 R129.1 | length 1.2
  Top Layer w0.2: DD10.20@153.592,49.548 153.592,50.45 R129.1@153.815,50.673
ADC_DITH1: DD11.20 R130.1 | length 1.2
  Top Layer w0.2: DD11.20@153.799,65.437 153.799,66.463 R130.1@153.942,66.606
ADC_LVDS0: DD10.61 R113.1 R124.2 | length 3.7
  Top Layer w0.125: DD10.61@153.592,40.698 153.592,39.47 R124.2@153.434,39.312 153.922,38.824 153.922,38.034 153.708,37.821 153.708,37.427 R113.1@153.688,37.407
ADC_LVDS1: DD11.61 R127.2 R128.1 | length 3.4
  Top Layer w0.125: DD11.61@153.799,56.587 153.769,56.557 153.769,56.119 153.75,56.1 153.75,55.679 R127.2@153.942,55.487 154.135,55.294 154.356,55.294 154.475,55.175 154.475,53.676 R128.1@154.45,53.651
ADC_MODE0: DD10.62 R114.1 R119.2 | length 3.9
  Top Layer w0.125: DD10.62@154.092,40.698 154.092,39.924 R119.2@154.704,39.312 154.216,38.824 154.216,38.034 154.467,37.784 154.467,37.644 R114.1@154.704,37.407
ADC_MODE1: DD11.62 R121.2 R122.1 | length 3.9
  Top Layer w0.125: DD11.62@154.299,56.587 154.299,56.001 154.671,55.629 154.943,55.629 R121.2@155.085,55.487 155.171,55.401 155.499,55.401 155.725,55.175 155.725,53.656 R122.1@155.72,53.651
ADC_RAND0: DD10.63 R117.2 | length 2.3
  Top Layer w0.125: DD10.63@154.592,40.698 154.592,40.117 154.704,40.005 155.477,40.005 155.72,39.762 R117.2@155.72,39.312
ADC_RAND1: DD11.63 R118.2 | length 2.2
  Top Layer w0.125: DD11.63@154.799,56.587 154.799,56.123 154.973,55.95 155.766,55.95 R118.2@156.228,55.487
AGND: C13.1 C20.1 C246.1 C268.1 DD16.25 DD16.33 L56.2 | length 16
  Top Layer w0.2: v1@55,12.125 55.275,12.4 DD16.33@55.275,13.525 55.275,14.512 55.615,14.852 55.615,14.855 C13.1@55.835,15.075 ; C20.1@59.185,15.075 59.275,14.985 DD16.25@59.275,13.525 v1(59.275,12.511) v1@59.275,12.5
  Top Layer w0.4: v1@61.45,13.7 L56.2@62.325,13.7
  Layer 3 w0.4: v1(55,12.136) 55.286,11.85 58.614,11.85 v1(59.275,12.511) 60.439,13.675 v1(61.45,13.675)
  Bottom Layer w0.2: v1(55,12.136) 55,12.082 55.11,11.972 C268.1@55.11,11.075 ; C246.1@59.235,11.7 59.275,11.74 v1(59.275,12.511)
AMP_PTT: DD1.A6 R38.1 | length 101.5
  Top Layer w0.125: R38.1@29.972,37.465 30.89,37.465 v1(30.9,37.475) ; v1(119.35,43.725) 119.398,43.725 119.561,43.563 119.925,43.563 120.362,43.125 120.362,42.805 120.862,42.305 120.862,42.178 121.465,41.575 122.003,41.575 122.612,40.966 DD1.A6@122.612,37.425
  Layer 1 w0.125: v1(55.45,39.275) 55.498,39.275 55.748,39.025 77.318,39.025 79.268,40.975 99.864,40.975 100.061,41.172 104.81,41.172 108.666,45.028 117.204,45.028 118.507,43.725 v1(119.35,43.725)
  Layer 2 w0.125: v1(30.9,37.475) 53.65,37.475 v1(55.45,39.275)
ANALOG_3V8: C41.2 L7.2 L22.1 L31.1 L32.1 L45.2 L47.1 | length 108.8
  Top Layer w0.8: L47.1@155.821,25.342 L47.1@155.86,25.303
  Top Layer w1: v3@134.825,54.85 134.825,53.736 135.086,53.475 136.325,53.475 L32.1@136.4,53.4 ; L31.1@141.637,31.02 141.637,26.725 141.662,26.7 141.875,26.7
  Layer 4 w1: v4(84.602,65.015) 84.602,64.598 84.8,64.4 90.55,64.4 90.852,64.098 v4(90.852,63.348) ; v4(90.852,62.398) 90.852,62.184 91.05,61.986 92.464,61.986 98.55,55.9 133.825,55.9 134.263,55.463 134.65,55.075 134.8,55.075 141.675,48.2 141.675,26.5 ; 141.813,26.487 141.813,26.462 142.025,26.25 142.075,26.25 v3(142.2,26.125) 142.489,25.836 155.111,25.836 155.7,26.425 v3(155.7,27.225)
  other v3: 141.425,26.125 142.2,26.825 141.45,26.85 155.7,28.045 155.7,28.865 155.7,29.685 155.7,30.505 155.7,31.325 134.225,54.725 135,54.725 135,55.425 134.25,55.45
  other v4: 84.602,63.973 90.852,64.323 83.45,66.05 84.602,66.056 82.277,67.073 83.452,67.098 84.602,67.098
ATT_CLK: DD1.D6 R89.2 R92.2 | length 121.2
  Top Layer w0.125: v1(186.625,41.9) 186.869,41.656 R89.2@187.647,41.656 ; v1(187.269,57.269) 187.343,57.269 187.486,57.126 R92.2@188.1,57.126
  Top Layer w0.2: DD1.D6@122.612,35.025 v1(123.013,35.426)
  Layer 1 w0.125: v1(127.217,47.868) 127.175,47.91 127.175,60.561 135.739,69.125 155.193,69.125 158.093,66.225 163,66.225 163.725,66.95 184.118,66.95 186.55,64.518 186.55,58.02 v1@187.285,57.285 ; v1(186.625,41.9) 186.625,48.35 184.067,50.908 184.067,53.606 186.324,55.862 187.375,55.862 187.738,56.225 187.738,56.8 v1(187.269,57.269)
  Layer 2 w0.125: v1(123.013,35.426) 123.376,35.789 123.376,43.088 126.125,45.837 126.125,46.762 127.217,47.854 v1(127.217,47.868)
ATT_DATA: DD1.F11 R88.2 R91.2 | length 120.9
  Top Layer w0.125: v1(186.525,41.15) 186.908,40.767 R88.2@187.647,40.767 ; v1(187.225,56.225) 187.237,56.237 R91.2@188.1,56.237
  Top Layer w0.2: DD1.F11@126.612,33.425 v1(127.013,33.826)
  Layer 1 w0.125: v1(127.013,33.826) 127.4,34.213 127.4,38.929 127.15,39.179 127.15,47.275 127.65,47.775 127.65,60.718 135.832,68.9 155.1,68.9 158,66 163.093,66 163.818,66.725 184.025,66.725 186.325,64.425 186.325,56.182 ; v1(186.525,41.15) 186.525,41.487 186.262,41.75 186.262,48.394 183.842,50.815 183.842,53.699 186.325,56.182 ; v1(187.225,56.225) 187.182,56.182 186.325,56.182
ATT_LE0: DD1.A14 R90.2 | length 104.6
  Top Layer w0.2: v1(128.611,37.826) DD1.A14@129.012,37.425 ; v4(183.617,49.558) R90.2@184.34,49.558
  Layer 1 w0.125: v1(128.611,37.826) 127.625,38.812 127.625,39.023 127.375,39.273 127.375,47.182 127.875,47.682 127.875,60.625 135.925,68.675 155.007,68.675 157.907,65.775 163.186,65.775 163.911,66.5 183.932,66.5 186.1,64.332 186.1,56.275 183.617,53.792 v4(183.617,49.558)
ATT_LE1: DD1.E11 R93.2 | length 92.8
  Top Layer w0.2: DD1.E11@126.612,34.225 v1(127.013,34.626) ; v4(186.78,66.7) R93.2@187.6,66.7
  Layer 1 w0.125: v1(127.013,34.626) 127.013,38.237 127.175,38.399 127.175,38.834 126.854,39.154 126.854,60.559 135.645,69.35 155.286,69.35 158.186,66.45 162.907,66.45 163.632,67.175 186.305,67.175 v4(186.78,66.7)